# Altium PCB ExtensionBoard.PcbDoc
Units mil, origin at the board's own origin, x right, y up, seen from the top; angles counter-clockwise.
Board outline 1045 x 1045 mil, 4 copper layers (Top Layer, Int1 (GND), Int2 (PWR), Bottom Layer), stack 61.581 mil thick; 30 components, 35 nets, 148 pads, 79 vias.
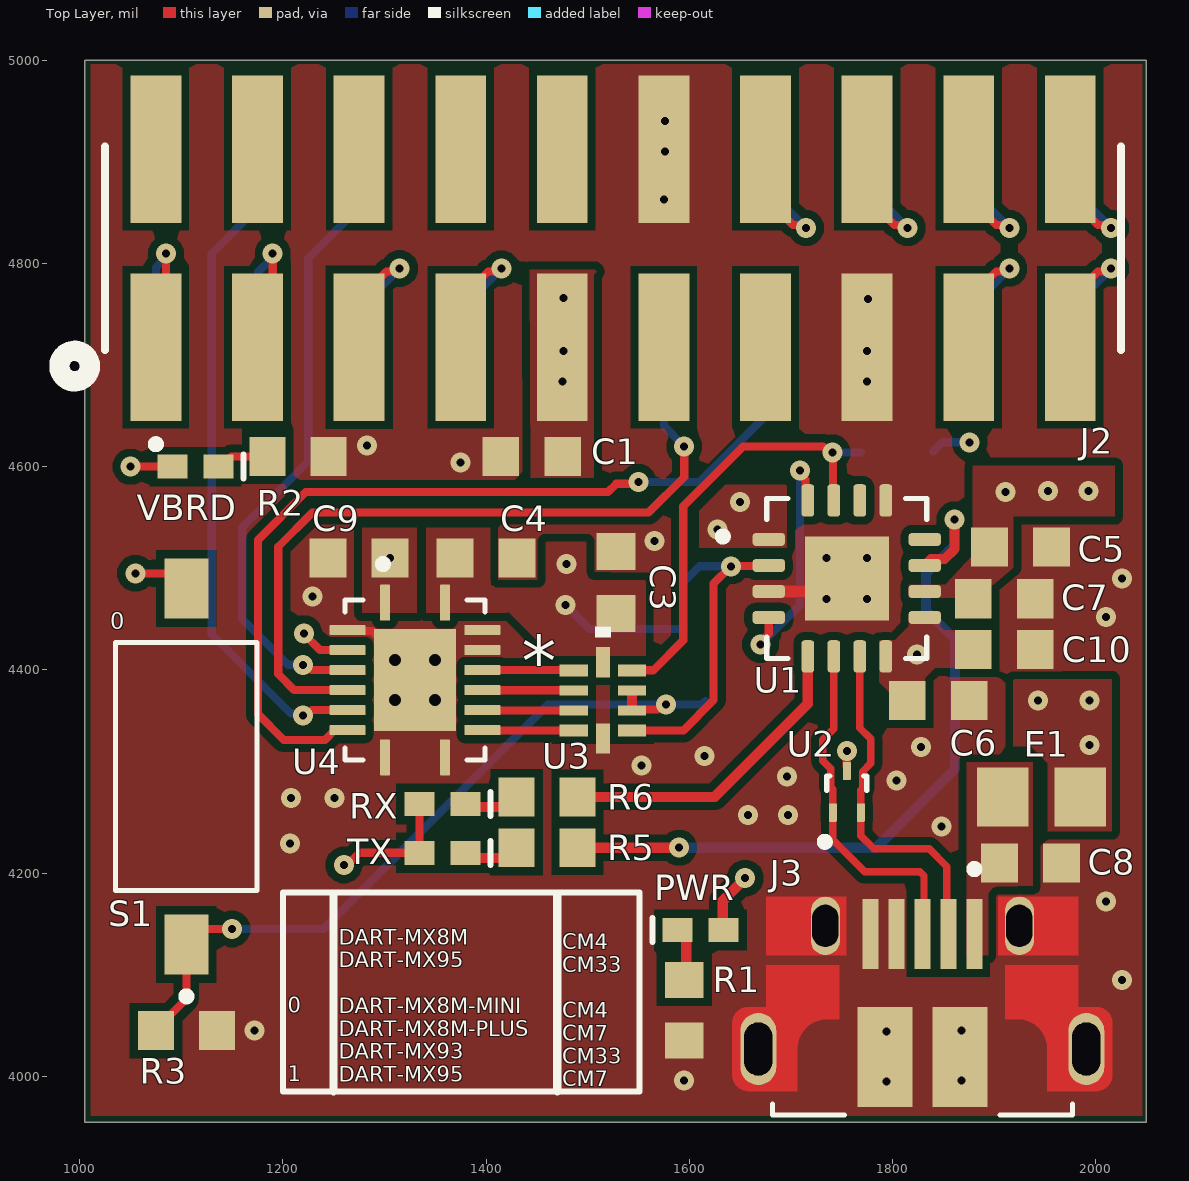
[diagram p0: Top Layer view]
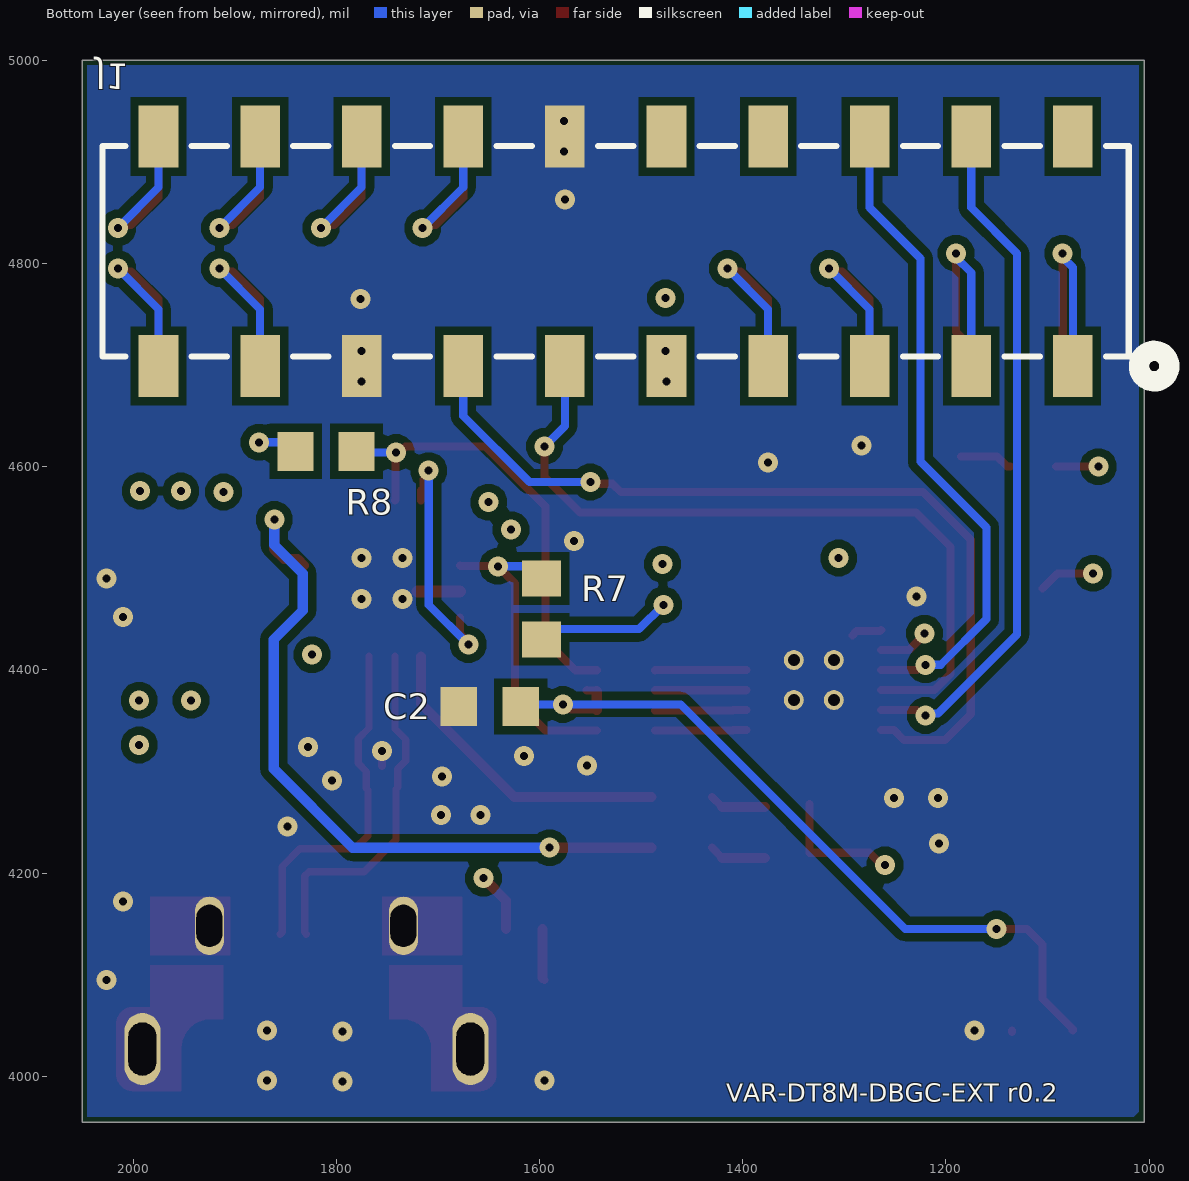
[diagram p1: Bottom Layer view, seen from below]
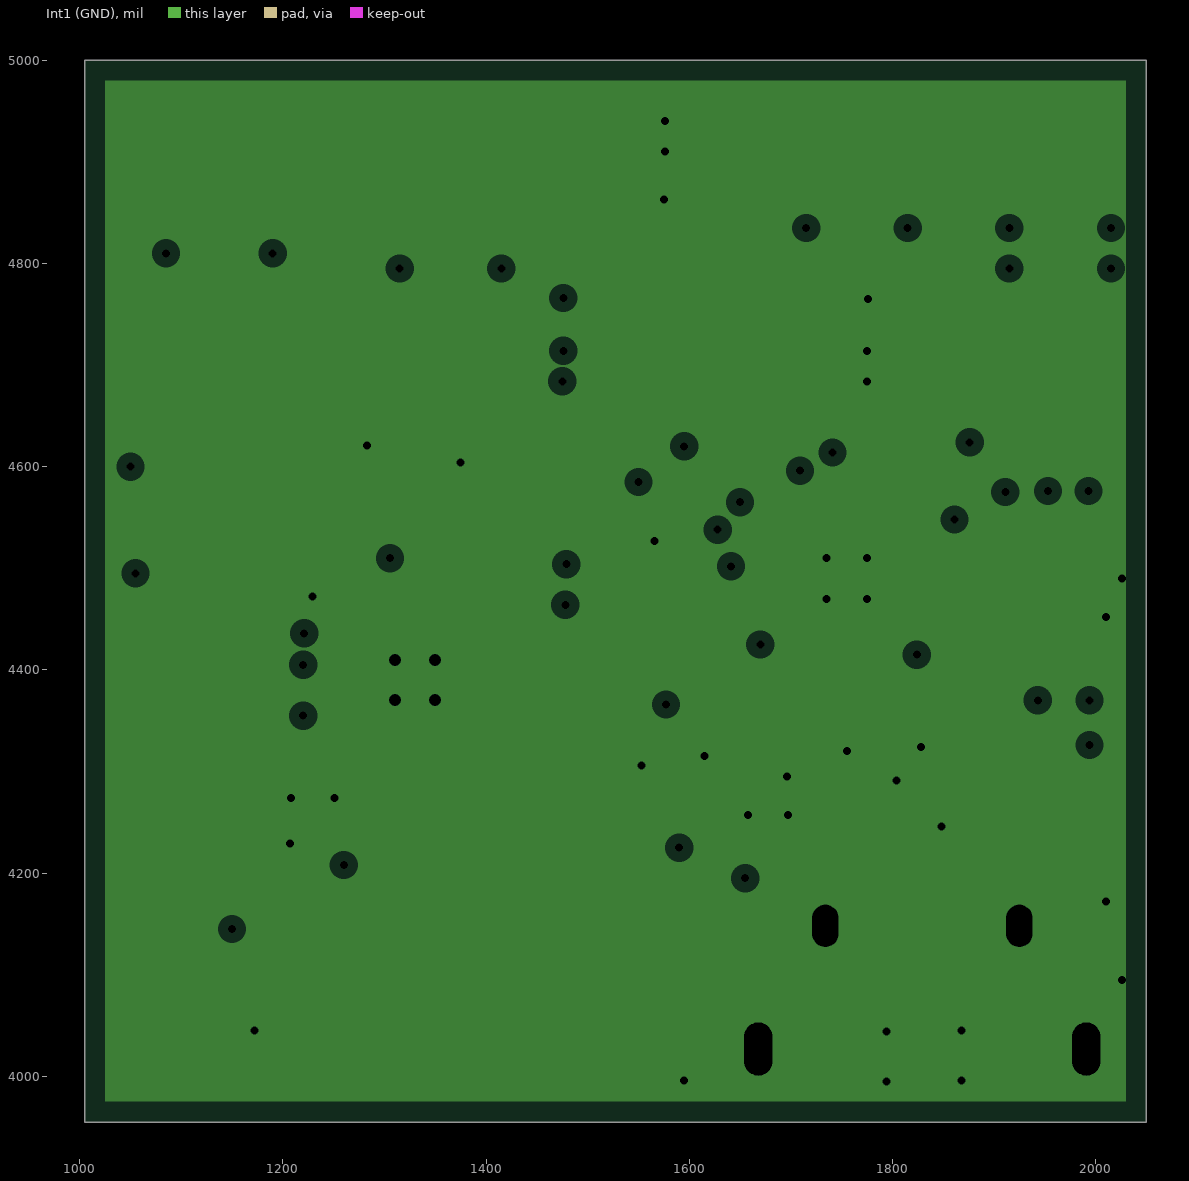
[diagram p2: Int1 (GND), clearances drawn from the general rule]
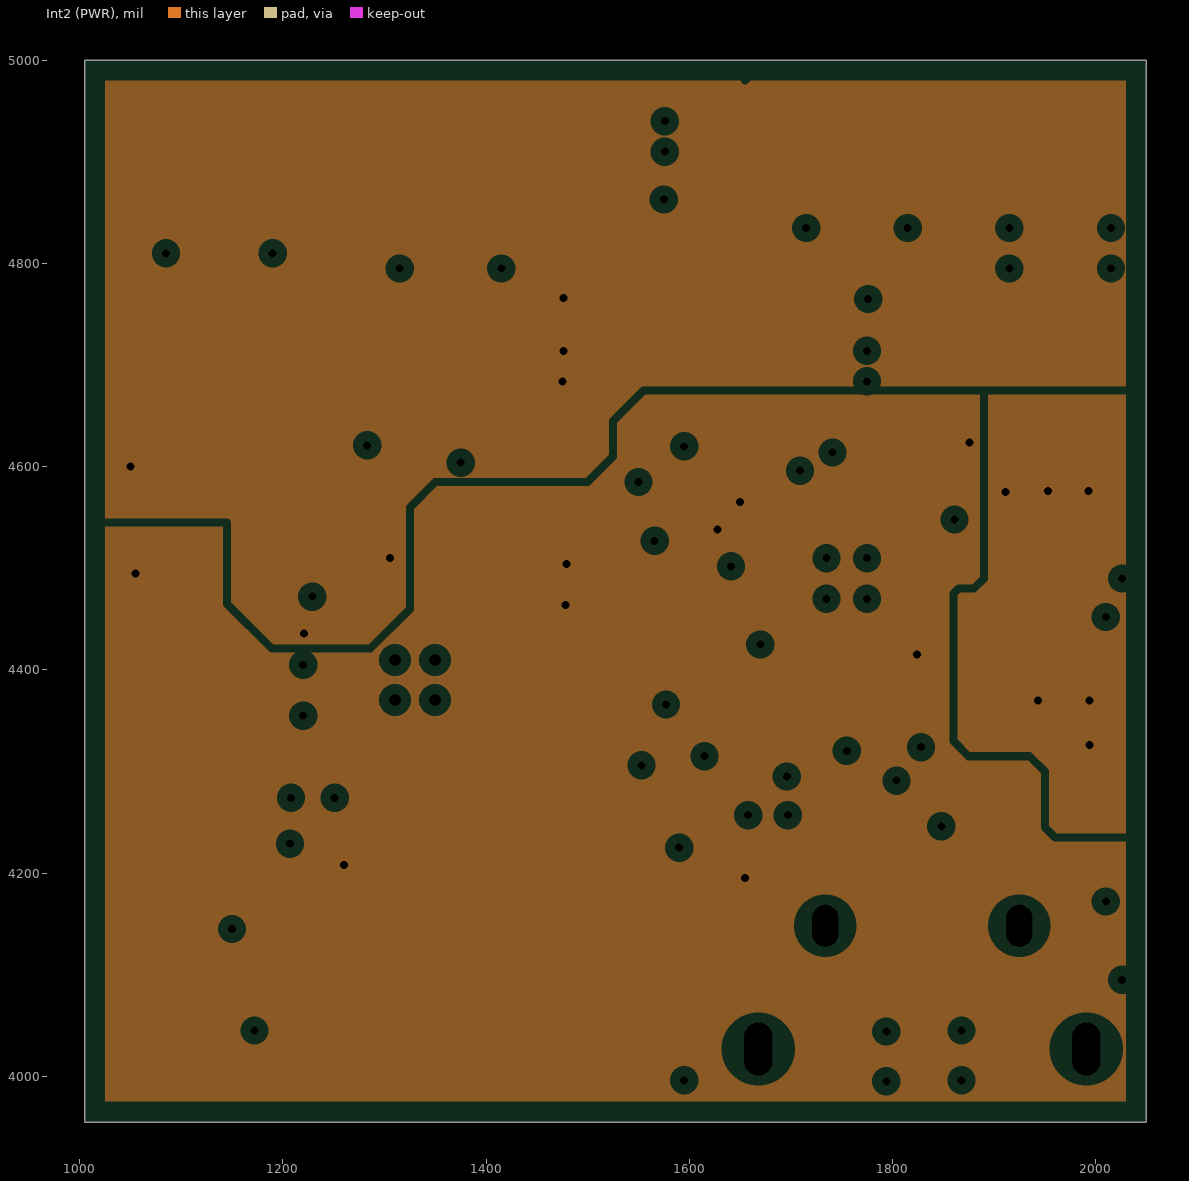
[diagram p3: Int2 (PWR), clearances drawn from the general rule]
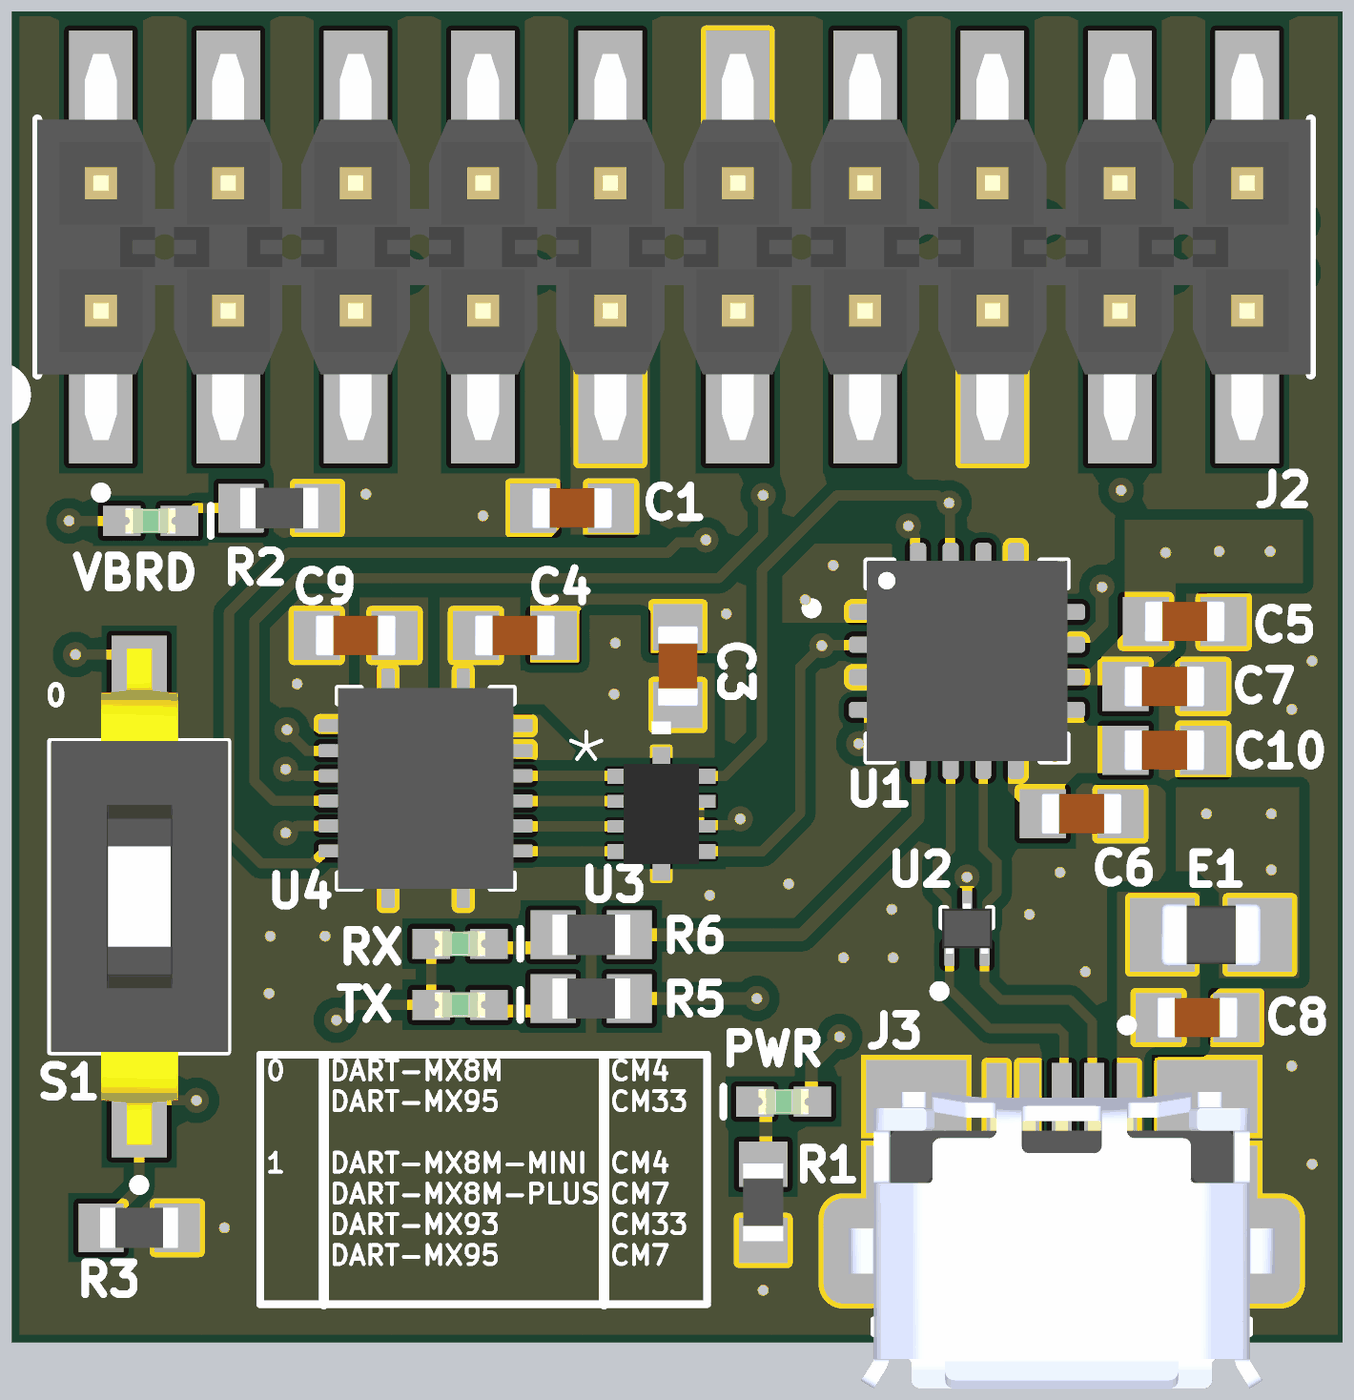
[diagram p4: 3D render of the assembled board from above, using the file's embedded part models]
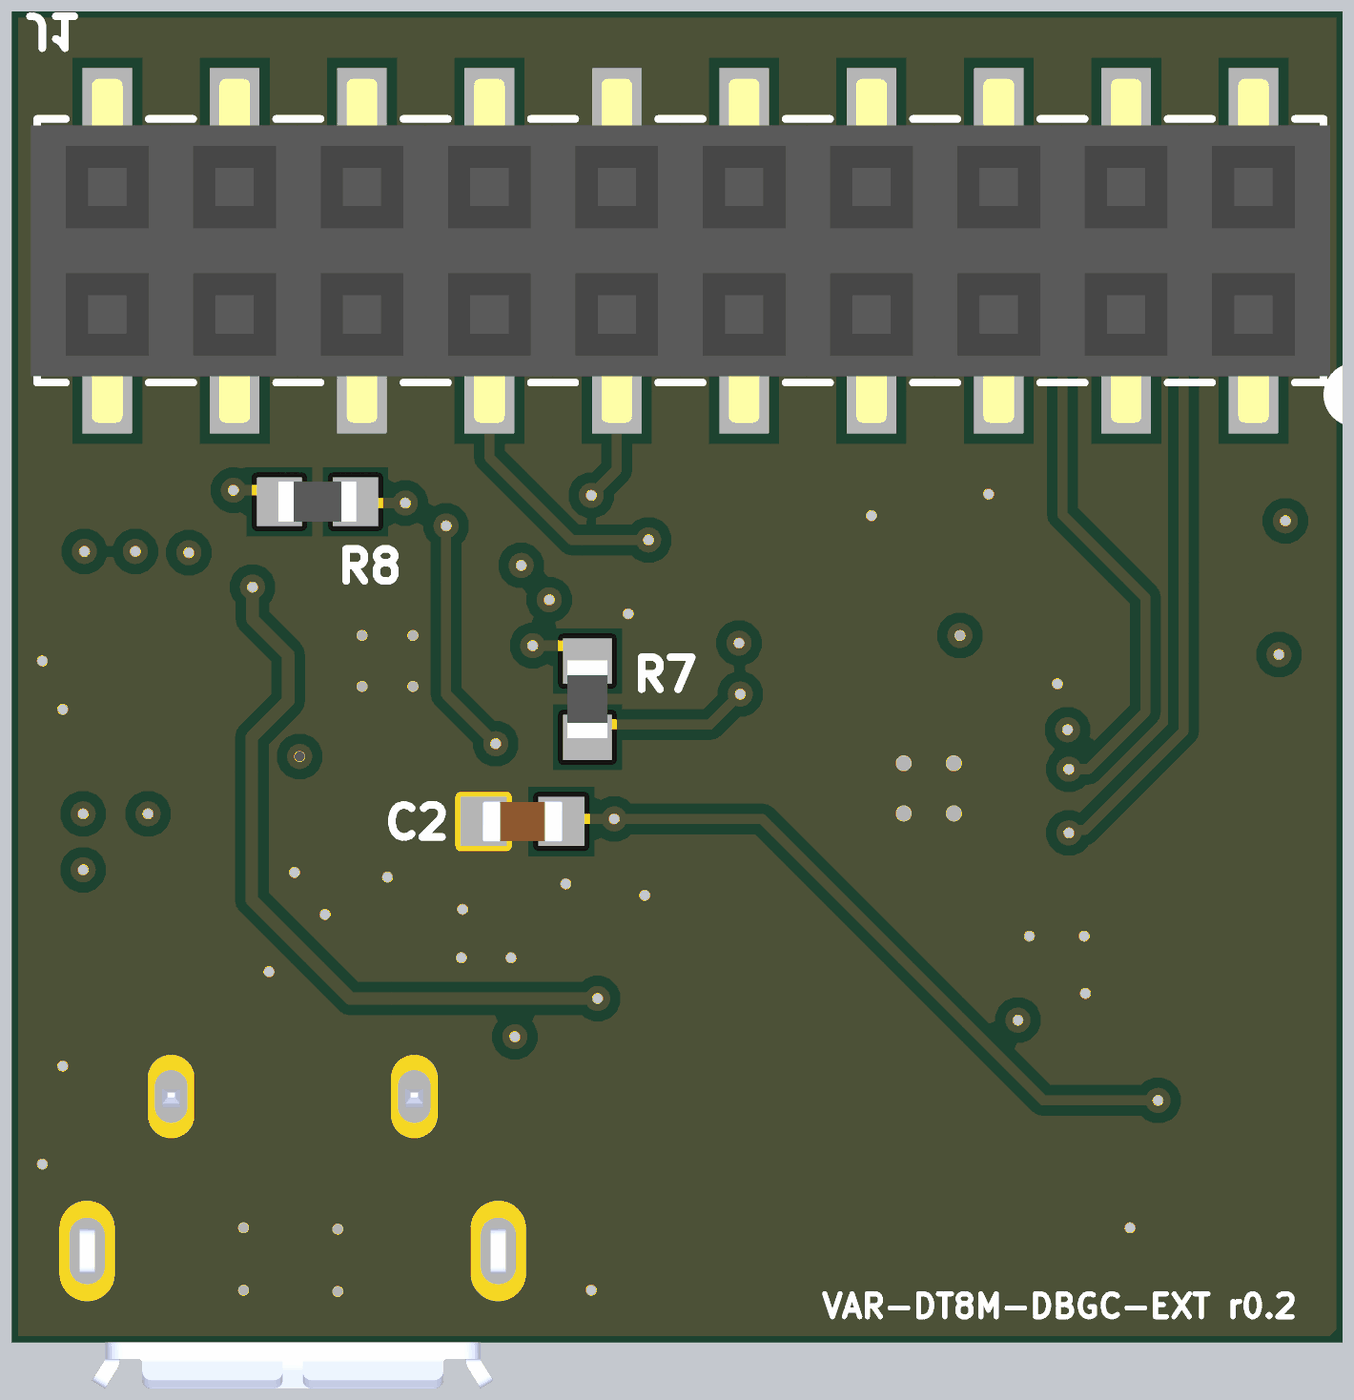
[diagram p5: 3D render of the assembled board from below, using the file's embedded part models]

## Layer stack, top to bottom
Top Solder: solder mask 0.6, Solder Resist, Dk 3.8
Top Layer: signal copper 1.378
Dielectric 1: prepreg 3.913, NP-155F, Dk 4.1
Int1 (GND): plane copper 0.598, net GND
Dielectric 2: core 49.803, NP-155F, Dk 4.43
Int2 (PWR): plane copper 0.598, net (Multiple Nets)
Dielectric 3: prepreg 3.913, NP-155F, Dk 4.1
Bottom Layer: signal copper 1.378
Bottom Solder: solder mask 0.6, Solder Resist, Dk 3.8

## Board outline
1005,3955 1005,5000 2050,5000 2050,3955

## Design rules (kind name [scope] priority, off if disabled: settings)
Clearance [All] p1: gap=8 ignorepadtopadclearanceinfootprint=TRUE except(0: Arc-Hole Track-Hole SMDPad-Hole THPad-Hole Via-Hole Fill-Hole Poly-Hole Region-Hole Text-Hole)
DiffPairsRouting [All] p1: maxlimit=15 minlimit=15 mostfreqgap=15 toplayer_minwidth=7.34 toplayer_maxwidth=7.34 toplayer_prefwidth=7.34 bottomlayer_minwidth=7.34 bottomlayer_maxwidth=7.34 bottomlayer_prefwidth=7.34 impedanceprofiledriven=TRUE impedanceprofileid={29B53C0B-546E-4A32-B24F-88CE2720B12B} impedanceprofilevalue=90.000000 maxuncoupledlength=500
PlaneClearance [All] p1: clearance=10
PlaneConnect [All] p1: planeconnectstyle=Relief reliefexpansion=20 reliefentries=4 reliefconductorwidth=10 reliefairgap=10
PolygonConnect VBUS [InNet('VBUS')] p1: connectstyle=Direct reliefconductorwidth=10 reliefentries=4 polygonreliefangle="90 Angle" airgapwidth=10
PolygonConnect VBUS_C [InNet('VBUS_C')] p2: connectstyle=Direct reliefconductorwidth=10 reliefentries=4 polygonreliefangle="90 Angle" airgapwidth=10
PolygonConnect GND [InNet('GND')] p3: connectstyle=Direct reliefconductorwidth=10 reliefentries=4 polygonreliefangle="90 Angle" airgapwidth=10
PolygonConnect 3V3VOUT [InNet('3V3OUT')] p4: connectstyle=Direct reliefconductorwidth=10 reliefentries=4 polygonreliefangle="90 Angle" airgapwidth=10
PolygonConnect BASE_PER_3V3 [InNet('BASE_PER_3V3')] p5: connectstyle=Direct reliefconductorwidth=10 reliefentries=4 polygonreliefangle="90 Angle" airgapwidth=10
PolygonConnect [All] p6: connectstyle=Relief reliefconductorwidth=10 reliefentries=4 polygonreliefangle="45 Angle" airgapwidth=10
RoutingVias [All] p1: holewidth=7.87 width=11.81 viastyle="Through Hole" minholewidth=7.87 minwidth=11.81 maxholewidth=7.87 maxwidth=11.81
SolderMaskExpansion SolderMaskExpansion_Via [IsVia] p1: expansion=4 istentingtop=TRUE soldermaskfromhole=TRUE
SolderMaskExpansion [All] p2: expansion=4 istentingtop=FALSE
UnRoutedNet [All] p1: checkbadconnections=TRUE
Width [All] p1: maxlimit=15 minlimit=6 preferedwidth=8 minimp=50.000000 maximp=50.000000 favimp=50.000000
26 further rules are at their usual default settings.

## Classes and differential pairs
differential pair class USB_D: USB_D
differential pair USB_D: +USB_D_P -USB_D_N

## Components (designator, comment, footprint, x,y, rotation, side; value= is the part's Value field where it differs from the comment)
C1 "LMK107BJ475KAHT" CAPC1608X90N 1445,4610 r0 top value=4.7uF
C2 "0603YC104K4T4A" CAPC1608X90N 1649,4364 r0 bottom value=100nF
C3 "0603YC104K4T4A" CAPC1608X90N 1528,4486 r270 top value=100nF
C4 "0603YC104K4T4A" CAPC1608X90N 1400,4510 r180 top value=100nF
C5 "LMK107BJ475KAHT" CAPC1608X90N 1926,4521 r180 top value=4.7uF
C6 "0603YC104K4T4A" CAPC1608X90N 1845,4370 r180 top value=100nF
C7 "0603YC104K4T4A" CAPC1608X90N 1910,4470 r180 top value=100nF
C8 "0603YC104K4T4A" CAPC1608X90N 1935.94,4210 r180 top value=100nF
C9 "0603YC104K4T4A" CAPC1608X90N 1275,4510 r180 top value=100nF
C10 "0603YC104K4T4A" CAPC1608X90N 1910,4420 r180 top value=100nF
E1 "MI0805K601R-10" FB_MI0805K601R-10 1946.69,4275 r180 top value="600R 1.5A"
J1 "RS2BE-20-G-SMT" CONN_RS2BE-20-G-SMT_ADM 1525,4812 r0 bottom locked
J2 "TSM-110-01-F-DV" SAMTEC_TSM-110-01-F-DV 1525,4815 r180 top locked
J3 "10103592-0001LF" AMPHENOL_10103592-0001LF 1829.41,4026.81 r0 top locked
PWR "QBL595-IG5" "LED 0402_1005 GREEN" 1611,4144 r0 top
R1 "RMCF0603JT240R" RESC1508X55N 1595,4065 r90 top value=240R
R2 "RMCF0603JT240R" RESC1508X55N 1215,4610 r180 top value=240R
R3 "RMCF0603JT10K0" RESC1508X55N 1105,4045 r180 top value=10K
R5 "RMCF0603JT240R" RESC1508X55N 1460,4225 r0 top value=240R
R6 "RMCF0603JT240R" RESC1508X55N 1460,4275 r0 top value=240R
R7 "RMCF0603JT10K0" RESC1508X55N 1598,4460 r270 bottom value=10K
R8 "RMCF0603JT10K0" RESC1508X55N 1810,4615 r0 bottom value=10K
RX "QBL595-IG5" "LED 0402_1005 GREEN" 1357,4268 r180 top
S1 "DS04-254-2-01BK-SMT" SW_DS04-254-2-01BK-SMT 1105,4305 r90 top value=DIP
TX "QBL595-IG5" "LED 0402_1005 GREEN" 1357,4220 r180 top
U1 "FT230XQ-R" QFN65P400X400X80-17N 1755,4490 r0 top
U2 "TPD2EUSB30ADRTR" SOTFL35P100X50-3N 1755,4280 r90 top
U3 "TS3A24157RSER" RSE10 1515,4370 r0 top
U4 "SN74AVC4T245RGYR" QFN50P400X350X100-17N 1330,4390 r270 top
VBRD "QBL595-IG5" "LED 0402_1005 GREEN" 1114,4600 r180 top

## Footprints (in the part's own frame and the unit in brackets; to place one, negate y for a bottom-side part, rotate by r counter-clockwise, add the part's x,y. Pads: shape width x height; smd on the part's side, far side on the other; paste and mask are expansions set on the pad)
AMPHENOL_10103592-0001LF [mm]
  rect 0.4x1.75 smd: 1(1.3,2.875) 2(0.65,2.875) 3(0,2.875) 4(-0.65,2.875) 5(-1.3,2.875)
  oval 0.9x1.8 hole 0.7 slot 1.326 at 90 deg: S1(-4.1,0) S3(4.1,0)
  oval 0.73x1.46 hole 0.65 slot 1.05 at 90 deg: S2(-2.425,3.08) S4(2.425,3.08)
  rect 1.375x2.5 smd: S5(-0.937,-0.2) S6(0.937,-0.2)
  Top Layer region: 3.9,2.35 1.9,2.35 1.9,3.81 3.9,3.81
  Top Layer region: 3.9,1.05 4.35,1.05 4.371,1.049 4.392,1.048 4.413,1.045 4.433,1.041 4.454,1.036 4.474,1.03 4.493,1.023 4.513,1.015 4.532,1.006 4.55,0.996 4.568,0.985 4.585,0.974 4.602,0.961 4.618,0.947 4.633,0.933 4.647,0.918 4.661,0.902 4.674,0.885 4.685,0.868 4.696,0.85 4.706,0.832 4.715,0.813 4.723,0.793 4.73,0.774 4.736,0.754 4.741,0.733 4.745,0.713 4.748,0.692 4.749,0.671 4.75,0.65 4.75,-0.65 4.749,-0.671 4.748,-0.692 4.745,-0.713 4.741,-0.733 4.736,-0.754 4.73,-0.774 4.723,-0.793 4.715,-0.813 4.706,-0.832 4.696,-0.85 4.685,-0.868 4.674,-0.885 4.661,-0.902 4.647,-0.918 4.633,-0.933 4.618,-0.947 4.602,-0.961 4.585,-0.974 4.568,-0.985 4.55,-0.996 4.532,-1.006 4.513,-1.015 4.493,-1.023 4.474,-1.03 4.454,-1.036 4.433,-1.041 4.413,-1.045 4.392,-1.048 4.371,-1.049 4.35,-1.05 3.125,-1.05 3.125,0 3.124,0.039 3.121,0.078 3.116,0.117 3.109,0.156 3.099,0.194 3.088,0.232 3.075,0.269 3.06,0.305 3.043,0.34 3.025,0.375 3.004,0.408 2.982,0.441 2.958,0.472 2.932,0.502 2.905,0.53 2.877,0.557 2.847,0.583 2.816,0.607 2.783,0.629 2.75,0.65 2.715,0.668 2.68,0.685 2.644,0.7 2.607,0.713 2.569,0.724 2.531,0.734 2.492,0.741 2.453,0.746 2.414,0.749 2.375,0.75 2.075,0.75 2.075,2.1 3.9,2.1
  Top Layer region: -1.9,2.35 -3.9,2.35 -3.9,3.81 -1.9,3.81
  Top Layer region: -2.075,0.75 -2.375,0.75 -2.414,0.749 -2.453,0.746 -2.492,0.741 -2.531,0.734 -2.569,0.724 -2.607,0.713 -2.644,0.7 -2.68,0.685 -2.715,0.668 -2.75,0.65 -2.783,0.629 -2.816,0.607 -2.847,0.583 -2.877,0.557 -2.905,0.53 -2.932,0.502 -2.958,0.472 -2.982,0.441 -3.004,0.408 -3.025,0.375 -3.043,0.34 -3.06,0.305 -3.075,0.269 -3.088,0.232 -3.099,0.194 -3.109,0.156 -3.116,0.117 -3.121,0.078 -3.124,0.039 -3.125,0 -3.125,-1.05 -4.35,-1.05 -4.371,-1.049 -4.392,-1.048 -4.413,-1.045 -4.433,-1.041 -4.454,-1.036 -4.474,-1.03 -4.493,-1.023 -4.513,-1.015 -4.532,-1.006 -4.55,-0.996 -4.568,-0.985 -4.585,-0.974 -4.602,-0.961 -4.618,-0.947 -4.633,-0.933 -4.647,-0.918 -4.661,-0.902 -4.674,-0.885 -4.685,-0.868 -4.696,-0.85 -4.706,-0.832 -4.715,-0.813 -4.723,-0.793 -4.73,-0.774 -4.736,-0.754 -4.741,-0.733 -4.745,-0.713 -4.748,-0.692 -4.749,-0.671 -4.75,-0.65 -4.75,0.65 -4.749,0.671 -4.748,0.692 -4.745,0.713 -4.741,0.733 -4.736,0.754 -4.73,0.774 -4.723,0.793 -4.715,0.813 -4.706,0.832 -4.696,0.85 -4.685,0.868 -4.674,0.885 -4.661,0.902 -4.647,0.918 -4.633,0.933 -4.618,0.947 -4.602,0.961 -4.585,0.974 -4.568,0.985 -4.55,0.996 -4.532,1.006 -4.513,1.015 -4.493,1.023 -4.474,1.03 -4.454,1.036 -4.433,1.041 -4.413,1.045 -4.392,1.048 -4.371,1.049 -4.35,1.05 -3.9,1.05 -3.9,2.1 -2.075,2.1
  silkscreen extent -3.75,-1.65 3.75,4.6, body extent -4.25,-2.75 4.25,3.23, height 2.77
CAPC1608X90N [mm]
  rect 0.92x0.98 smd: 1(-0.775,0) 2(0.775,0)
  body extent -0.8,-0.4 0.8,0.41, height 0.9
CONN_RS2BE-20-G-SMT_ADM [mil]
  rect 39x61 smd paste+0 mask+0: 1(-450,113) 2(-450,-113) 3(-350,113) 4(-350,-113) 5(-250,113) 6(-250,-113) 7(-150,113) 8(-150,-113) 9(-50,113) 10(-50,-113) 11(50,113) 12(50,-113) 13(150,113) 14(150,-113) 15(250,113) 16(250,-113) 17(350,113) 18(350,-113) 19(450,113) 20(450,-113)
  silkscreen extent -545,-104 505,128, body extent -510,-135 510,135, height 295
FB_MI0805K601R-10 [mm]
  rect 1.285x1.47 smd: 1(-0.973,0) 2(0.973,0)
  body extent -1,-0.63 1,0.62, height 1.1
"LED 0402_1005 GREEN" [mm] "Chip Diode, 2-Leads, Body 1.00x0.50mm, IPC Medium Density"
  rect 0.75x0.6 smd: 1(-0.575,0) 2(0.575,0)
  silkscreen extent -1.2,-0.3 -1.2,0.3, body extent -0.5,-0.25 0.5,0.25, height 0.21
QFN50P400X350X100-17N [mm]
  rrect25% 0.9x0.26 smd: 1(-1.935,-0.75) 8(1.935,-0.75) 9(1.935,0.75) 16(-1.935,0.75)
  rrect25% 0.26x0.9 smd: 2(-1.25,-1.685) 3(-0.75,-1.685) 4(-0.25,-1.685) 5(0.25,-1.685) 6(0.75,-1.685) 7(1.25,-1.685) 10(1.25,1.685) 11(0.75,1.685) 12(0.25,1.685) 13(-0.25,1.685) 14(-0.75,1.685) 15(-1.25,1.685)
  rect 2.55x2.05 smd paste-2: 17(0,0)
  round 0.5 hole 0.3 mask+0: 18(-0.5,0.5) 19(0.5,0.5) 20(0.5,-0.5) 21(-0.5,-0.5)
  silkscreen extent -3,-1.75 2,1.75, body extent -2,-1.75 2,1.75, height 1
QFN65P400X400X80-17N [mm]
  rrect50% 0.81x0.32 smd: 1(-1.95,0.975) 2(-1.95,0.325) 3(-1.95,-0.325) 4(-1.95,-0.975) 9(1.95,-0.975) 10(1.95,-0.325) 11(1.95,0.325) 12(1.95,0.975)
  rrect50% 0.32x0.81 smd: 5(-0.975,-1.95) 6(-0.325,-1.95) 7(0.325,-1.95) 8(0.975,-1.95) 13(0.975,1.95) 14(0.325,1.95) 15(-0.325,1.95) 16(-0.975,1.95)
  rect 2.1x2.1 smd paste-2: 17(0,0)
  silkscreen extent -3.2,-2 2,2, body extent -2,-2 2,2, height 0.8
RESC1508X55N [mm]
  rect 0.9x0.97 smd: 1(-0.76,0) 2(0.76,0)
  body extent -0.78,-0.4 0.77,0.4, height 0.55
RSE10 [mm]
  rect 0.705x0.3 smd mask+0.051: 1(-0.727,0.75) 4(-0.727,-0.75) 6(0.727,-0.75) 9(0.727,0.75)
  rect 0.705x0.25 smd mask+0.051: 2(-0.727,0.25) 3(-0.727,-0.25) 7(0.727,-0.25) 8(0.727,0.25)
  rect 0.35x0.755 smd mask+0.051: 5(0,-0.952) 10(0,0.952)
  silkscreen extent -0.19,1.58 0.19,1.84, body extent -0.75,-1 0.75,1, height 0.6
SAMTEC_TSM-110-01-F-DV [mm]
  rect 1.27x3.68 smd: 1(11.43,2.475) 2(11.43,-2.475) 3(8.89,2.475) 4(8.89,-2.475) 5(6.35,2.475) 6(6.35,-2.475) 7(3.81,2.475) 8(3.81,-2.475) 9(1.27,2.475) 10(1.27,-2.475) 11(-1.27,2.475) 12(-1.27,-2.475) 13(-3.81,2.475) 14(-3.81,-2.475) 15(-6.35,2.475) 16(-6.35,-2.475) 17(-8.89,2.475) 18(-8.89,-2.475) 19(-11.43,2.475) 20(-11.43,-2.475)
  silkscreen extent -12.7,-2.54 12.7,5, body extent -12.7,-3.85 12.7,3.85, height 9.91
SOTFL35P100X50-3N [mm]
  rrect25% 0.46x0.2 smd: 1(-0.52,0.35) 2(-0.52,-0.35) 3(0.52,0)
  silkscreen extent -1.35,-0.5 0.4,0.65, body extent -0.5,-0.5 0.5,0.5, height 0.5
SW_DS04-254-2-01BK-SMT [mm]
  rect 1.5x1.1 smd: 1A(-4.45,0) 1B(4.45,0)
  silkscreen extent -5.85,-1.77 3.1,1.77, body extent -4.95,-1.78 4.95,1.76, height 3.98

## Part data
C1 C5: "CAPACITOR, MLCC, X5R, 4.7UF, 10V, 0603, REEL, FULL REEL", Package=None, Availability=Unavailable, MP=LMK107BJ475KAHT, Price=None
C2 C3 C4 C6 C7 C8 C9 C10: "Cap Ceramic 0.1uF 16V X7R 10% SMD 0603 125ÂÂŽ Paper T/R", Package=None, Availability=Unavailable, MP=0603YC104K4T4A, Price=None
E1: "600 Ohms @ 100MHz 1 Power Line Ferrite Bead 0805 (2012 Metric) 1.5A 100mOhm", Package="0805 Laird", Availability=Warning, Check_prices=https://www.snapeda.com/parts/MI0805K601R-10/Laird-Signal%20Integrity%20Products/view-part/332699/?ref=eda, MF="Laird-Signal Integrity", MP=MI0805K601R-10, Price=None, Purchase-URL=https://pricing.snapeda.com/search/part/MI0805K601R-10/?ref=eda, SnapEDA_Link=https://www.snapeda.com/parts/MI0805K601R-10/Laird-Signal%20Integrity%20Products/view-part/332699/?ref=snap
J1: "No Description Available", Mfr_Name="ADAM TECHNOLOGIES INC", RefDes=RefDes, Type="Headers, Receptacles, Female Sockets"
J2 R3 R7 R8: Package=None, Availability=Unavailable, Price=None
  J2: MF=Samtec, MP=TSM-110-01-F-DV
  R3 R7 R8: MP=RMCF0603JT10K0
J3: "Micro USB 2.0, Input Output Connectors, B TYPE REVERSE", Package=None, Check_prices=https://www.snapeda.com/parts/10103592-0001LF/Amphenol+FCI/view-part/?ref=eda, Digi-Key_Part_Number=609-4048-2-ND, MF="Amphenol ICC", MP=10103592-0001LF, Purchase-URL=https://pricing.snapeda.com/search/part/10103592-0001LF/?ref=eda, SnapEDA_Link=https://www.snapeda.com/parts/10103592-0001LF/Amphenol+FCI/view-part/?ref=snap
PWR RX TX VBRD: "LED Green Clear 0402 SMD"
R1 R2 R5 R6: library part RMCF0603JT10K0, Package=None, Availability=Unavailable, MP=RMCF0603JT10K0, Price=None
S1: "1 Position, Surface Mount, 2.54 mm Pitch, Flat Slide Actuator, Flat Bottom, SMT Pin, DIP Switch", Package=None, Availability="In Stock", Check_prices=https://www.snapeda.com/parts/DS04-254-2-01BK-SMT/CUI+Devices/view-part/?ref=eda, CUI_purchase_URL=https://www.cuidevices.com/product/switches/dip-switches/ds04-254-smt-series?utm_source=snapeda.com&utm_medium=referral&utm_campaign=snapedaBOM, MF="CUI Devices", MP=DS04-254-2-01BK-SMT, Price=None, Purchase-URL=https://pricing.snapeda.com/search/part/DS04-254-2-01BK-SMT/?ref=eda, SnapEDA_Link=https://www.snapeda.com/parts/DS04-254-2-01BK-SMT/CUI+Devices/view-part/?ref=snap
U1: "USB Bridge, USB to UART USB 2.0 UART Interface 16-QFN (4x4)", Package="QFN-16 FTDI", Availability=Unavailable, DigiKey-Purchase-URL=https://snapeda.com/shop?store=DigiKey&id=51347, MF=FTDI,, MP=FT230XQ-R, Price=None, SnapEDA_Link=https://www.snapeda.com/parts/FT230XQ-R/FTDI,%20Future%20Technology%20Devices%20International%20Ltd/view-part/51347/?ref=snap
U2: "2-Channel ESD/Surge Solution for High-Speed Low-Voltage Interface", Package="SOT-9X3-3 Texas Instruments", Arrow_Electronics-Purchase-URL=https://snapeda.com/shop?store=Arrow+Electronics&id=186330, Availability=Unavailable, DigiKey-Purchase-URL=https://snapeda.com/shop?store=DigiKey&id=186330, MF="Texas Instruments", Mouser-Purchase-URL=https://snapeda.com/shop?store=Mouser&id=186330, MP=TPD2EUSB30ADRTR, Price=None, SnapEDA_Link=https://www.snapeda.com/parts/TPD2EUSB30ADRTR/Texas%20Instruments/view-part/186330/?ref=snap, Texas_Instruments-Purchase-URL=https://snapeda.com/shop?store=Texas+Instruments&id=186330
U3: "No Description Available", Mfr_Name="Texas Instruments", RefDes=RefDes, Type=Type
U4: "4-Bit Dual-Supply Bus Transceiver with Configurable Voltage-Level Shifting and 3-State Outputs 16-VQFN -40 to 85", Package=None, Availability=Unavailable, MP=SN74AVC4T245RGYR, Price=None

## Via types
v1: diameter 19.68, hole 7.87, Top Layer to Bottom Layer, tented both sides, 79 vias

## Nets (pads, with @x,y where several pads share a name; then routed paths per layer and width w, separated by ;. In a path a pad name is that pad's centre, name@x,y a point inside that pad or via, vN(x,y) a via of type N, cw(c..) or ccw(c..) an arc to the next point about the centre after c; other vN are vias at no path point)
3V3OUT: C3.2 C4.2 C6.2 C10.2 PWR.2 R7.2 R8.2 RX.2 S1.1B TX.2 U1.1 U1.8 U1.9 U3.10 U4.16 | length 408.3
  Top Layer w8: v1(1055,4495) 1090.2,4495 S1.1B ; v1(1260,4208) 1263.16,4208 1275.16,4220 TX.2 RX.2
  Top Layer w10: PWR.2@1632.91,4145 1632.91,4172.91 v1(1655,4195)
  Bottom Layer w8: v1(1478,4464) 1501.92,4440.08 R7.2@1594,4440.08 ; R8.2 1848.92,4624 v1(1876,4624)
  other v1: 1824,4415 1479,4504 1628,4538 1650,4565
BASE_PER_3V3: C1.2 C9.1 J1.9 J2.9 U4.1 U4.3 VBRD.2 | length 91.5
  Top Layer w8: v1(1050,4600) VBRD.2 ; v1(1221,4436) 1221,4434.89 1236.36,4419.53 U4.3
  other v1: 1305.51,4510 1475,4684 1476,4714 1476,4766
ENET_MDC: J1.16 J2.16 | length 206.4
  Top Layer w8: J2.16 1775,4865 1802.13,4837.87 1812.13,4837.87 v1(1815,4835)
  Bottom Layer w8: J1.16 1775,4875 v1(1815,4835)
ENET_MDIO: J1.14 J2.14 | length 206.4
  Top Layer w8: J2.14 1675,4865 1702.13,4837.87 1712.13,4837.87 v1(1715,4835)
  Bottom Layer w8: J1.14 1675,4875 v1(1715,4835)
FT_RX: R7.1 U1.2 U3.6 | length 317
  Top Layer w8: U3.6 1594.19,4340.47 1624,4370.28 1624,4485 v1(1641,4502) 1641.4,4502.4 1677.83,4502.4 U1.2
  Bottom Layer w8: R7.1 1610.08,4502 v1(1641,4502)
FT_TX: R8.1 U1.15 U3.9 | length 444.4
  Top Layer w8: U3.9 1543.69,4399.58 1564.58,4399.58 1594,4429 1594,4561 1653,4620 1731.84,4620 1737.84,4614 v1(1741,4614) 1741.6,4613.4 1741.6,4567.38 U1.15
  Bottom Layer w8: v1(1741,4614) 1768.8,4614 R8.1@1769.08,4613.72
GND: C1.1 C2.2 C3.1 C4.1 C5.1 C6.1 C7.1 C8.1 C9.2 C10.1 J1.12 J1.15 J2.12 J2.15 J3.4 J3.5 J3.S1 J3.S2 J3.S3 J3.S4 J3.S5 J3.S6 R1.1 R2.1 R3.1 U1.3 U1.13 U1.17 U2.3 U3.5 U4.2 U4.8 U4.9 U4.14 U4.15 U4.17 U4.18 U4.19 U4.20 U4.21 | length 91.4
  Top Layer w8: R3.1@1134.92,4043.62 R3.1 ; U4.2 1264.78,4438.09 1287.91,4438.09 U4.17@1292,4434 ; U2.3@1755,4305.53 v1(1755,4320.33) ; U1.17@1773.52,4511.48 U1.17@1776.48,4511.48
  Top Layer w12: U1.3 U1.17@1720,4477.2
  other v1: 1794,3995 1595,3996 1868,3996 1794,4044 1172,4045 1868,4045 2026,4095 2010,4172 1207,4229 1848,4246 1658,4257 1697,4257 1208,4274 1251,4274 1804,4291 1696,4295 1553,4306 1615,4315 1828,4324 2010,4452 1735,4470 1775,4470 1229,4472 2026,4490 1735,4510 1775,4510 1566,4527 1375,4604 1283,4621 1775,4684 1775,4714 1776,4765 1575,4863 1576,4910 1576,4940
I2CA_SCL: J1.18 J2.18 | length 206.4
  Top Layer w8: J2.18 1875,4865 1902.13,4837.87 1912.13,4837.87 v1(1915,4835)
  Bottom Layer w8: J1.18 1875,4875 v1(1915,4835)
I2CA_SDA: J1.20 J2.20 | length 206.4
  Top Layer w8: J2.20 1975,4865 2002.13,4837.87 2012.13,4837.87 v1(2015,4835)
  Bottom Layer w8: J1.20 1975,4875 v1(2015,4835)
I2CB_SCL: J1.17 J2.17 | length 212.4
  Top Layer w8: J2.17 1875,4765 1902.13,4792.13 1912.13,4792.13 v1(1915,4795)
  Bottom Layer w8: J1.17 1875,4755 v1(1915,4795)
I2CB_SDA: J1.19 J2.19 | length 212.4
  Top Layer w8: J2.19 1975,4765 2002.13,4792.13 2012.13,4792.13 v1(2015,4795)
  Bottom Layer w8: J1.19 1975,4755 v1(2015,4795)
NetPWR_1: PWR.1 R1.2 | length 50.9
  Top Layer w8: R1.2 R1.2@1597.09,4097.01
  Top Layer w10: R1.2@1597.09,4097.01 PWR.1@1597.09,4145
NetR2_2: R2.2 VBRD.1 | length 52.6
  Top Layer w8: VBRD.1 1139.59,4600 1149.59,4610 R2.2
NetR5_1: R5.1 TX.1 | length 56.3
  Top Layer w8: R5.1@1420.08,4215 R5.1
  Top Layer w10: TX.1@1377.91,4215 R5.1@1420.08,4215
NetR6_1: R6.1 RX.1 | length 56.3
  Top Layer w8: R6.1@1420.08,4265 R6.1
  Top Layer w10: RX.1@1377.91,4265 R6.1@1420.08,4265
NetU1_4: U1.4 U1.16 | length 249.6
  Top Layer w8: v1(1670,4425) 1670,4427.1 1678.23,4435.33 U1.4 ; v1(1709,4596) 1709,4592.84 1714.32,4587.52 1714.32,4578.72 1716.61,4576.42 U1.16
  Bottom Layer w8: v1(1670,4425) 1709,4464 v1(1709,4596)
RXLED: R5.2 U1.11 | length 737.7
  Top Layer w10: R5.2 v1(1590,4225) ; U1.11 1838.06,4509.09 1851.26,4509.09 1861,4518.83 v1(1861,4548)
  Bottom Layer w10: v1(1590,4225) 1784,4225 1861.56,4302.56 1861.56,4429.92 1833,4458.48 1833,4494.85 1861,4522.85 v1(1861,4548)
TXLED: R6.2 U1.5 | length 311.3
  Top Layer w10: R6.2 1625,4275 1716.61,4366.61 U1.5
UART_SEL: C2.1 R3.2 S1.1A U3.7 U3.8 | length 774.5
  Top Layer w8: R3.2 1075.08,4046.38 1105,4076.3 S1.1A 1120.2,4145 v1(1150,4145) ; U3.7 1543.64,4360.38 1544.34,4361.08 1568.92,4361.08 1573.84,4366 v1(1577,4366) ; U3.8@1545,4379.62 1544.34,4379.62 1543.64,4378.92 U3.8 1553.36,4379.84 U3.8@1553.51,4380
  Top Layer w10: U3.7@1543.64,4360.38 U3.8@1543.64,4378.92
  Bottom Layer w8: v1(1150,4145) 1240,4145 1461,4366 v1(1577,4366) 1612.49,4366 C2.1@1616,4369.51
UARTA_RX: J1.6 U4.4 | length 647.1
  Top Layer w8: v1(1220,4405) 1223.16,4405 1228.32,4399.84 U4.4
  Bottom Layer w8: v1(1220,4405) 1205,4405 1160,4450 1160,4540 1225,4605 1225,4805 1275,4855 J1.6
UARTA_RX_C: U3.1 U4.13 | length 90.2
  Top Layer w8: U4.13 1486.05,4399.84 U3.1
UARTA_TX: J1.4 U4.6 | length 677.7
  Top Layer w8: v1(1220,4355) 1223.16,4355 1228.63,4360.47 U4.6
  Bottom Layer w8: J1.4 1175,4855 1130,4810 1130,4435 1207.76,4357.24 1217.76,4357.24 v1(1220,4355)
UARTA_TX_C: U3.3 U4.11 | length 90.2
  Top Layer w8: U4.11 1408.94,4360.47 1409.25,4360.16 U3.3
UARTB_RX: J1.11 U4.5 | length 745.4
  Top Layer w8: U4.5 1211.13,4380.16 1195.47,4395.81 1195.47,4521.18 1229.29,4555 1560,4555 1595,4590 v1(1595,4620)
  Bottom Layer w8: J1.11 1575,4640 v1(1595,4620)
UARTB_RX_C: U3.2 U4.12 | length 90.2
  Top Layer w8: U4.12 1396.49,4380 1486.21,4380 U3.2
UARTB_TX: J1.13 U4.7 | length 873.2
  Top Layer w8: U4.7 1251.06,4340.79 1241.43,4331.16 1200.84,4331.16 1175.47,4356.53 1175.47,4527.93 1222.54,4575 1520,4575 1528.15,4583.15 1548.15,4583.15 v1(1550,4585)
  Bottom Layer w8: v1(1550,4585) 1610,4585 1675,4650 J1.13
UARTB_TX_C: U3.4 U4.10 | length 90.2
  Top Layer w8: U4.10 1408.94,4340.79 1409.25,4340.47 U3.4
UARTBT_CTSn: J1.3 J2.3 | length 215.9
  Top Layer w8: J2.3 1190,4732.56 v1(1190,4810)
  Bottom Layer w8: J1.3 1175,4790.94 1190,4805.94 v1(1190,4810)
UARTBT_RTSn: J1.7 J2.7 | length 212.4
  Top Layer w8: J2.7 1375,4765 1402.13,4792.13 1412.13,4792.13 v1(1415,4795)
  Bottom Layer w8: J1.7 1375,4755 v1(1415,4795)
UARTBT_RX: J1.5 J2.5 | length 212.4
  Top Layer w8: J2.5 1275,4765 1302.13,4792.13 1312.13,4792.13 v1(1315,4795)
  Bottom Layer w8: J1.5 1275,4755 v1(1315,4795)
UARTBT_TX: J1.1 J2.1 | length 211.7
  Top Layer w8: J2.1 1085,4727.56 v1(1085,4810)
  Bottom Layer w8: J1.1 1075,4795.94 1085,4805.94 v1(1085,4810)
USB_D_N: J3.2 U1.7 U2.2 | length 349.2
  Top Layer w7.34: U1.7 1767.8,4342.8 1778.51,4332.08 1778.51,4307.91 1770.61,4300 1770.61,4283.24 1768.78,4281.41 U2.2 1768.78,4236.85 1781.79,4223.85 1835.99,4223.85 1853.38,4206.46 1853.38,4141.62 J3.2
USB_D_P: J3.3 U1.6 U2.1 | length 351.3
  Top Layer w7.34: U1.6 1742.2,4342.2 1731.49,4331.49 1731.49,4310.59 1739.39,4302.68 1739.39,4284.58 1741.22,4282.75 U2.1 1741.22,4232.82 1772.53,4201.5 1826.73,4201.5 1831.03,4197.2 1831.03,4141.62 J3.3
VBUS: C5.2 C7.2 E1.1 U1.10
  other v1: 1994,4326 1943,4370 1994,4370 1911,4575 1953,4576 1993,4576
VBUS_C: C8.2 E1.2 J3.1
pads on no net: J1.2 J1.8 J1.10 J2.2 J2.4 J2.6 J2.8 J2.10 J2.11 J2.13 U1.12 U1.14
copper on no net: | length 2.6
  Top Layer w10: 1260,4208 1262.62,4208

## Polygon pours and split planes (outlines as drawn)
GND on Top Layer "GND_L01_P006" (solid, remove dead copper, pour order 6): 1011,4996 2046,4996 2046,3961 1011,3961
VBUS_C on Top Layer "VBUS_C_L01_P025" (solid, pour order 25): 1873,4119 1938,4119 1938,4309 1873,4309
3V3OUT on Top Layer "3V3OUT_L01_P019" (solid, pour order 19): 1557,4414 1557,4488 1521,4488 1521,4526 1399,4526 1399,4456 1423,4456 1465,4414
VBUS on Top Layer "VBUS_L01_P027" (solid, pour order 27): 1899,4484 1919,4500.48 1919,4551 2019,4551 2019,4601 1879,4601 1879,4512.59 1852,4484
BASE_PER_3V3 on Top Layer "BASE_PER_3V3_L01_P030" (solid, pour order 30): 1332,4540 1278,4540 1278,4456 1332,4456
BASE_PER_3V3 on Top Layer "BASE_PER_3V3_L01_P029" (solid, pour order 29): 1443,4794 1507,4794 1509,4792 1506,4789 1506,4585 1445,4585 1444,4584
VBUS on Top Layer "VBUS_L01_P028" (solid, pour order 28): 1816,4471 1816,4484 1865,4484 1864,4483 1864,4471
VBUS on Top Layer "VBUS_L01_P026" (solid, pour order 26): 2016,4241 2016,4391 1920,4391 1919,4390 1919,4325 1936,4325 1953,4308 1953,4241
3V3OUT on Top Layer "3V3OUT_L01_P022" (solid, pour order 22): 1787,4429 1787,4388 1800,4375 1832,4375 1832,4392 1842,4402 1871,4402 1871,4439 1851,4439 1847,4443 1847,4453 1818,4453 1816,4451 1816,4443 1802,4429
3V3OUT on Top Layer "3V3OUT_L01_P021" (solid, pour order 21): 1696,4520 1610,4520 1610,4560 1632,4582 1696,4582
3V3OUT on Top Layer "3V3OUT_L01_P017" (solid, pour order 17): 1341,4540 1404,4540 1404,4456 1341,4456
GND on Top Layer "GND_L01_P014" (solid, pour order 14): 1383,4445 1375,4445 1367,4437 1367,4412 1383,4412
GND on Bottom Layer "GND_L04_P001" (solid, remove dead copper, pour order 1): 1010,4995 2045,4995 2045,3960 1015,3960 1010,3965
GND on Int1 (GND) (split plane): 2029.9,3975.1 1025.1,3975.1 1025.1,4979.9 2029.9,4979.9
3V3OUT on Int2 (PWR) (split plane): 1885.92,4597 1885.92,4530 1885.92,4529 1885.92,4491.69 1878.31,4484.08 1865,4484.08 1863.44,4483.77 1862.78,4483.33 1862.12,4482.88 1857.12,4477.88 1856.23,4476.56 1855.92,4475 1855.92,4422.5 1855.92,4412.5 1855.92,4390 1855.92,4330 1856.23,4328.44 1857.12,4327.12 1872.12,4312.12 1873.44,4311.23 1875,4310.92 1933.31,4310.92 1945.92,4298.31 1945.92,4245 1946.23,4243.44 1947.12,4242.12 1957.12,4232.12 1958.44,4231.23 1960,4230.92 2029.9,4230.92 2029.9,3975.1 1025.1,3975.1 1025.1,4540.92 1140.92,4540.92 1140.92,4485 1140.92,4465 1141.23,4463.44 1142.12,4462.12 1186.12,4418.12 1187.44,4417.23 1189,4416.92 1286,4416.92 1287.56,4417.23 1288.88,4418.12 1327.88,4457.12 1328.77,4458.44 1329.08,4460 1329.08,4558.31 1351.69,4580.92 1500,4580.92 1501.56,4581.23 1502.88,4582.12 1527.88,4607.12 1528.77,4608.44 1529.08,4610 1529.08,4630 1529.08,4635 1529.08,4643.31 1556.69,4670.92 1885.92,4670.92
VBUS on Int2 (PWR) (split plane): 2029.9,4239.08 1961.69,4239.08 1954.08,4246.69 1954.08,4300 1953.77,4301.56 1952.88,4302.88 1937.88,4317.88 1936.56,4318.77 1935,4319.08 1876.69,4319.08 1864.08,4331.69 1864.08,4390 1864.08,4412.5 1864.08,4422.5 1864.08,4473.31 1866.69,4475.92 1880,4475.92 1881.56,4476.23 1882.88,4477.12 1892.88,4487.12 1893.77,4488.44 1894.08,4490 1894.08,4530 1894.08,4597 1894.08,4670.92 2029.9,4670.92
BASE_PER_3V3 on Int2 (PWR) (split plane): 2029.9,4679.08 1555,4679.08 1553.44,4678.77 1552.12,4677.88 1522.12,4647.88 1521.23,4646.56 1520.92,4645 1520.92,4635 1520.92,4630 1520.92,4611.69 1498.31,4589.08 1350,4589.08 1348.44,4588.77 1347.12,4587.88 1322.12,4562.88 1321.23,4561.56 1320.92,4560 1320.92,4461.69 1284.31,4425.08 1190.69,4425.08 1149.08,4466.69 1149.08,4485 1149.08,4545 1148.77,4546.56 1147.88,4547.88 1146.56,4548.77 1145,4549.08 1025.1,4549.08 1025.1,4979.9 1650.94,4979.9 1651.23,4978.44 1652.12,4977.12 1653.44,4976.23 1655,4975.92 1656.56,4976.23 1657.88,4977.12 1660.67,4979.9 2029.9,4979.9

## Other copper
Int2 (PWR) (plane layer: these items are gaps in the copper):
  lines w8: 1005,4545 1145,4545 1145,4485 1145,4465 1189,4421 1286,4421 1325,4460 1325,4560 1350,4585 1500,4585 1525,4610 1525,4630 1525,4635 1525,4645 1555,4675 2050,4675 ; 1655,4980 1675,5000 ; 1890,4529 1890,4597 1890,4675 ; 1890,4530 1890,4490 1880,4480 1865,4480 1860,4475 1860,4422.5 1860,4412.5 1860,4390 1860,4330 1875,4315 1935,4315 1950,4300 1950,4245 1960,4235 2050,4235

## Silkscreen, mask and mechanical layers (free items; w line width, h text height)
Top Overlay:
  lines w6: 1200,3985 1551,3985 1551,4181 1200,4181 1200,3985
  lines w8: 1250,3985 1250,4180 ; 1470,3985 1470,4180
  text "0" at 1030,4440 h16
  text "0 /  /  / 1" at 1205,3995 h15
  text "DART-MX8M / DART-MX95 /  / DART-MX8M-MINI / DART-MX8M-PLUS / DART-MX93 / DART-MX95" at 1255,3994.64 h15
  text "CM4 / CM33 /  / CM4 / CM7 / CM33 / CM7" at 1475,3990 h15
Bottom Overlay:
  text "VAR-DT8M-DBGC-EXT r0.2" at 1416,3975 h18
Mechanical 1:
  the board outline again, w10

## Text inside footprints (layer, text, board x,y; h text height)
J3: Mechanical 13 "PCB EDGE" at 2035.12,3970.22 h32
U3: Top Overlay "*" at 1434.99,4384.37 h50; Mechanical 13 "*" at 1435,4385 h50